# Altium PCB DRV5021A3QDBZR.PcbDoc
Units mil, origin at the board's own origin, x right, y up, seen from the top; angles counter-clockwise.
Board outline 700 x 500 mil, 2 copper layers (Top Layer, Bottom Layer); 4 components, 207 nets, 12 pads, 0 vias.
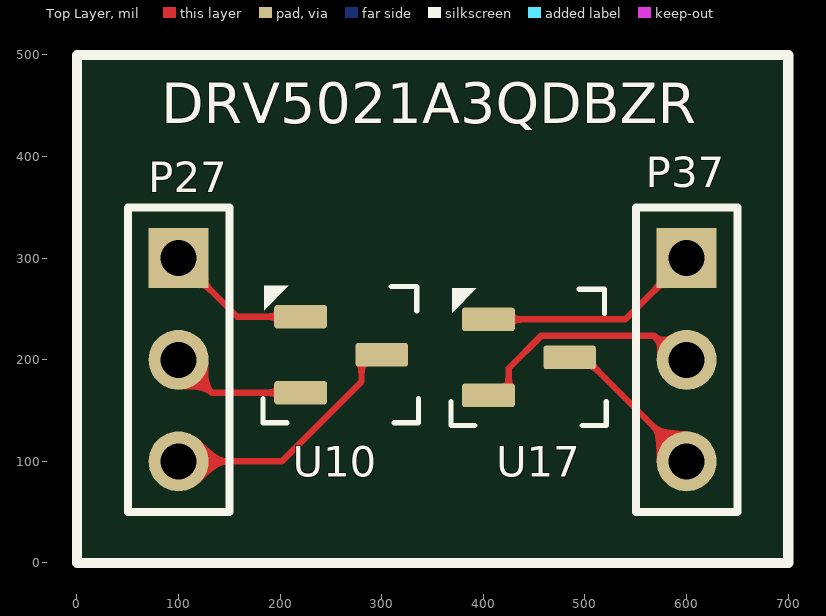
[diagram p0: Top Layer view]
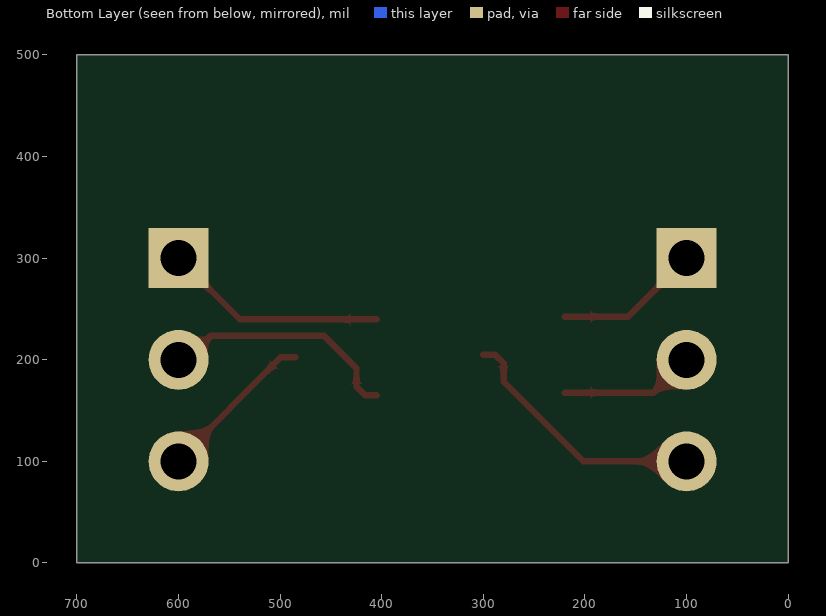
[diagram p1: Bottom Layer view, seen from below]

## Layer stack, top to bottom
Top Solder: solder mask 0.4, Solder Resist, Dk 3.5
Top Layer: signal copper 1.4
Dielectric 1: dielectric 12.6, FR-4, Dk 4.8
Bottom Layer: signal copper 1.4
Bottom Solder: solder mask 0.4, Solder Resist, Dk 3.5

## Board outline
0,0 700,0 700,500 0,500

## Design rules (kind name [scope] priority, off if disabled: settings)
Clearance [All] p1: gap=6.3 ignorepadtopadclearanceinfootprint=TRUE
PolygonConnect [All] p1: connectstyle=Relief reliefconductorwidth=10 reliefentries=4 polygonreliefangle="90 Angle" airgapwidth=10
RoutingVias [All] p1: holewidth=28 width=50 viastyle="Through Hole" minholewidth=28 minwidth=50 maxholewidth=28 maxwidth=50
SolderMaskExpansion [All] p1: expansion=4 istentingtop=FALSE
Width [All] p1: maxlimit=10 minlimit=6.3 preferedwidth=10 toplayer_maxwidth=6.3 toplayer_prefwidth=6.3 bottomlayer_minwidth=10 minimp=50.000000 maximp=50.000000 favimp=50.000000
30 further rules are at their usual default settings.

## Classes and differential pairs
component class STM32L010C6T6: B4
component class RTC: U7
component class Polarity_Protection: Q1 Q2
component class NV_Memory: B3
component class Motor_Driver: B2 U5 U6
component class Door_Sensor: S1 S2 U3
component class Current_Sensor: B1 U2
component class Battery_Gauge: U1

## Components (designator, comment, footprint, x,y, rotation, side; value= is the part's Value field where it differs from the comment)
P27 "Header 3" HDR1X3 100,300 r270 top
P37 "Header 3" HDR1X3 600,300 r270 top
U10 "DRV5021A3QDBZR" DRV5021A3QDBZR 260.04,205 r0 top
U17 "DRV5021A3QDBZR" DRV5021A3QDBZR 444.96,202.4 r0 top

## Footprints (in the part's own frame and the unit in brackets; to place one, negate y for a bottom-side part, rotate by r counter-clockwise, add the part's x,y. Pads: shape width x height; smd on the part's side, far side on the other; paste and mask are expansions set on the pad)
DRV5021A3QDBZR [mm]
  rrect25% 1.32x0.59 smd: 1(-1.015,0.95) 2(-1.015,-0.95) 3(1.015,0)
  silkscreen extent -1.96,-1.7 1.93,1.73, body extent -1.18,-1.46 1.18,1.46, height 1.12
HDR1X3 [mm] "Connector; Header; 3 Position"
  rect 1.5x1.5 hole 0.9: 1(0,0)
  round 1.5 hole 0.9: 2(2.54,0) 3(5.08,0)
  silkscreen extent -1.27,-1.27 6.35,1.27

## Part data
P27 P37: "Header, 3-Pin", LatestRevisionDate=17-Jul-2002, LatestRevisionNote="Re-released for DXP Platform.", Publisher="Altium Limited"
U10 U17: "Hall effect IC"

## Nets (pads, with @x,y where several pads share a name; then routed paths per layer and width w, separated by ;. In a path a pad name is that pad's centre, name@x,y a point inside that pad or via, vN(x,y) a via of type N, cw(c..) or ccw(c..) an arc to the next point about the centre after c; other vN are vias at no path point)
GND: 
NetB1_1: 
NetB1_2: 
NetB1_3: 
NetB1_4: 
NetB1_5: 
NetB1_6: 
NetB1_7: 
NetB1_8: 
NetB1_9: 
NetB1_10: 
NetB2_1: 
NetB2_2: 
NetB2_3: 
NetB2_4: 
NetB2_5: 
NetB2_6: 
NetB2_7: 
NetB2_8: 
NetB2_9: 
NetB3_1: 
NetB3_2: 
NetB3_3: 
NetB3_4: 
NetB3_5: 
NetB3_6: 
NetB3_7: 
NetB3_8: 
NetB3_9: 
NetB4_1: 
NetB4_2: 
NetB4_3: 
NetB4_4: 
NetB4_5: 
NetB4_6: 
NetB4_7: 
NetB4_8: 
NetB4_9: 
NetB4_10: 
NetB4_11: 
NetB4_12: 
NetB4_13: 
NetB4_14: 
NetB4_15: 
NetB4_16: 
NetB4_17: 
NetB4_18: 
NetB4_19: 
NetB4_20: 
NetB4_21: 
NetB4_22: 
NetB4_23: 
NetB4_24: 
NetB4_25: 
NetB4_26: 
NetB4_27: 
NetB4_28: 
NetB4_29: 
NetB4_30: 
NetB4_31: 
NetB4_32: 
NetB4_33: 
NetB4_34: 
NetB4_35: 
NetB4_36: 
NetB4_37: 
NetB4_38: 
NetB4_39: 
NetB4_40: 
NetB4_41: 
NetB4_42: 
NetB4_43: 
NetB4_44: 
NetB4_45: 
NetB4_46: 
NetB4_47: 
NetB4_48: 
NetP1_1: 
NetP1_2: 
NetP1_3: 
NetP1_4: 
NetP1_5: 
NetP1_6: 
NetP1_7: 
NetP1_8: 
NetP2_1: 
NetP2_2: 
NetP2_3: 
NetP2_4: 
NetP2_5: 
NetP2_6: 
NetP2_7: 
NetP5_1: 
NetP5_2: 
NetP5_3: 
NetP6_1: 
NetP6_2: 
NetP6_3: 
NetP7_1: 
NetP7_2: 
NetP7_3: 
NetP11_1: 
NetP11_2: 
NetP11_3: 
NetP14_1: 
NetP14_2: 
NetP14_3: 
NetP14_4: 
NetP14_5: 
NetP16_1: 
NetP16_2: 
NetP16_3: 
NetP17_1: 
NetP17_2: 
NetP17_3: 
NetP19_1: 
NetP19_2: 
NetP19_3: 
NetP19_4: 
NetP20_1: 
NetP20_2: 
NetP20_3: 
NetP21_1: 
NetP21_2: 
NetP21_3: 
NetP22_1: 
NetP22_2: 
NetP22_3: 
NetP22_4: 
NetP23_1: 
NetP23_2: 
NetP23_3: 
NetP23_4: 
NetP25_1: 
NetP25_2: 
NetP25_3: 
NetP26_1: 
NetP26_3: 
NetP27_1: P27.1 U10.1 | length 143.9
  Top Layer w6.3: P27.1 157.6,242.4 U10.1
NetP27_2: P27.2 U10.2 | length 133.5
  Top Layer w6.3: P27.2 132.4,167.6 U10.2
NetP27_3: P27.3 U10.3 | length 254.2
  Top Layer w6.3: P27.3 201.74,100 280.07,178.33 280.07,196.54 288.53,205 U10.3
NetP28_1: 
NetP28_2: 
NetP28_3: 
NetP29_1: 
NetP29_2: 
NetP29_3: 
NetP30_1: 
NetP30_2: 
NetP30_3: 
NetP31_1: 
NetP31_2: 
NetP32_1: 
NetP32_2: 
NetP33_1: 
NetP33_2: 
NetP34_1: 
NetP34_2: 
NetP35_1: 
NetP35_2: 
NetP36_1: 
NetP36_2: 
NetP36_3: 
NetP37_1: P37.1 U17.1 | length 219.9
  Top Layer w6.3: U17.1 539.8,239.8 P37.1
NetP37_2: P37.2 U17.2 | length 239.6
  Top Layer w6.3: U17.2 416.47,165 424.93,173.46 424.93,191.67 456.72,223.46 568.34,223.46 591.81,200 P37.2
NetP37_3: P37.3 U17.3 | length 158.5
  Top Layer w6.3: U17.3 499.29,202.4 600,101.69 P37.3
NetP38_1: 
NetP38_2: 
NetP38_3: 
NetP39_1: 
NetP39_2: 
NetP39_3: 
NetP40_1: 
NetP40_2: 
NetP40_3: 
NRST: 
PA0-CK_IN: 
PA1: 
PA2: 
PA3: 
PA4: 
PA5: 
PA6: 
PA7: 
PA8: 
PA9: 
PA10: 
PA11: 
PA12: 
PA13: 
PA14: 
PA15: 
PB0: 
PB1: 
PB3: 
PB4: 
PB5: 
PB6: 
PB7: 
PB9-BOOT0: 
PC14-OSC32_IN: 
PC15-OSC32_OUT: 
VDD1: 
VDD2: 
VDDA: 
VSS1: 
VSS2: 

## Silkscreen, mask and mechanical layers (free items; w line width, h text height)
Top Overlay:
  the board outline again, w10
  text "DRV5021A3QDBZR" at 83,433 h40